# EAGLE board Relay_block_v1_pcb_layout (EAGLE 9.7.0)
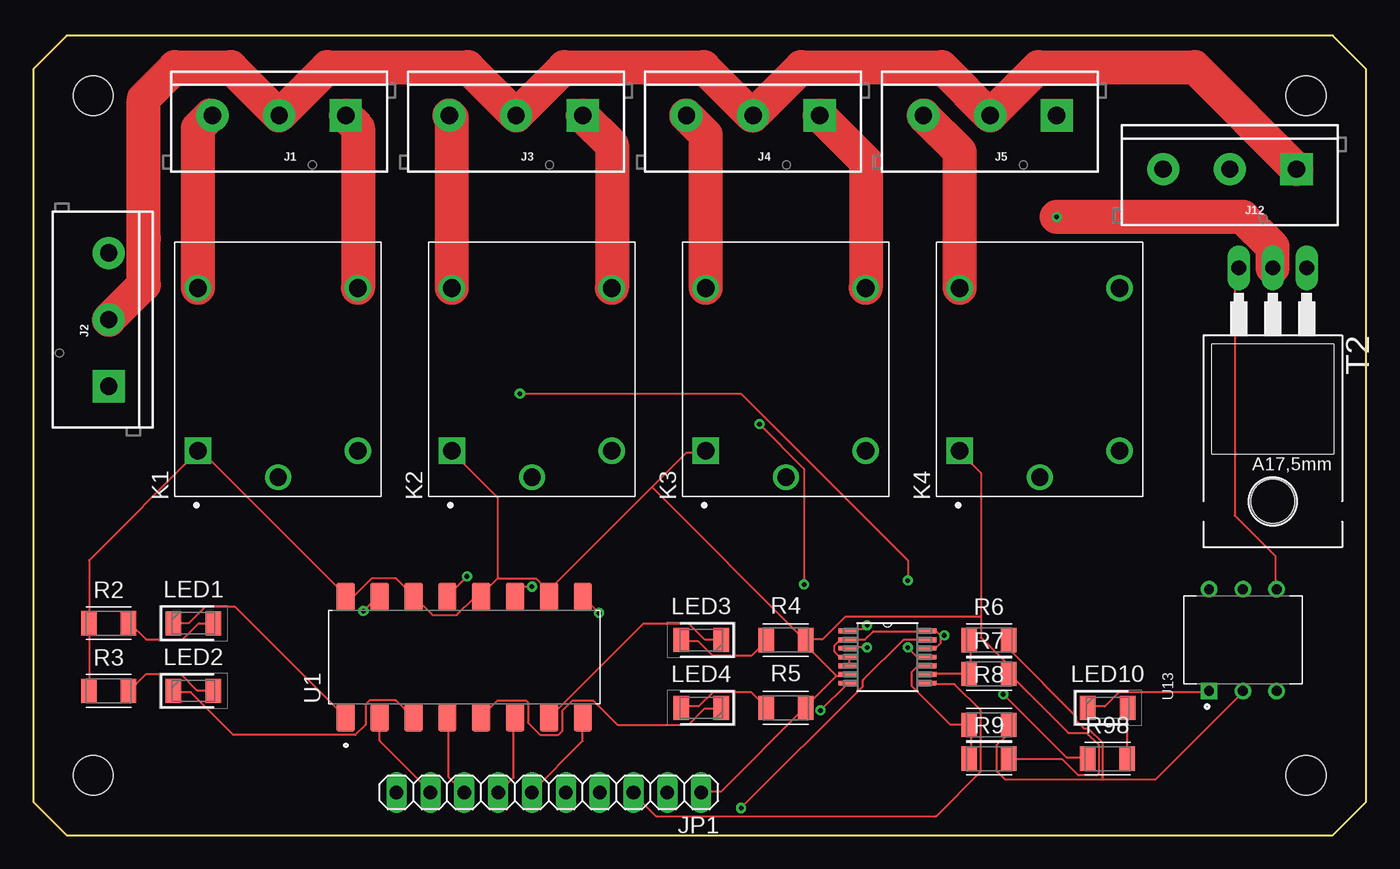
[diagram p0: board, top side]
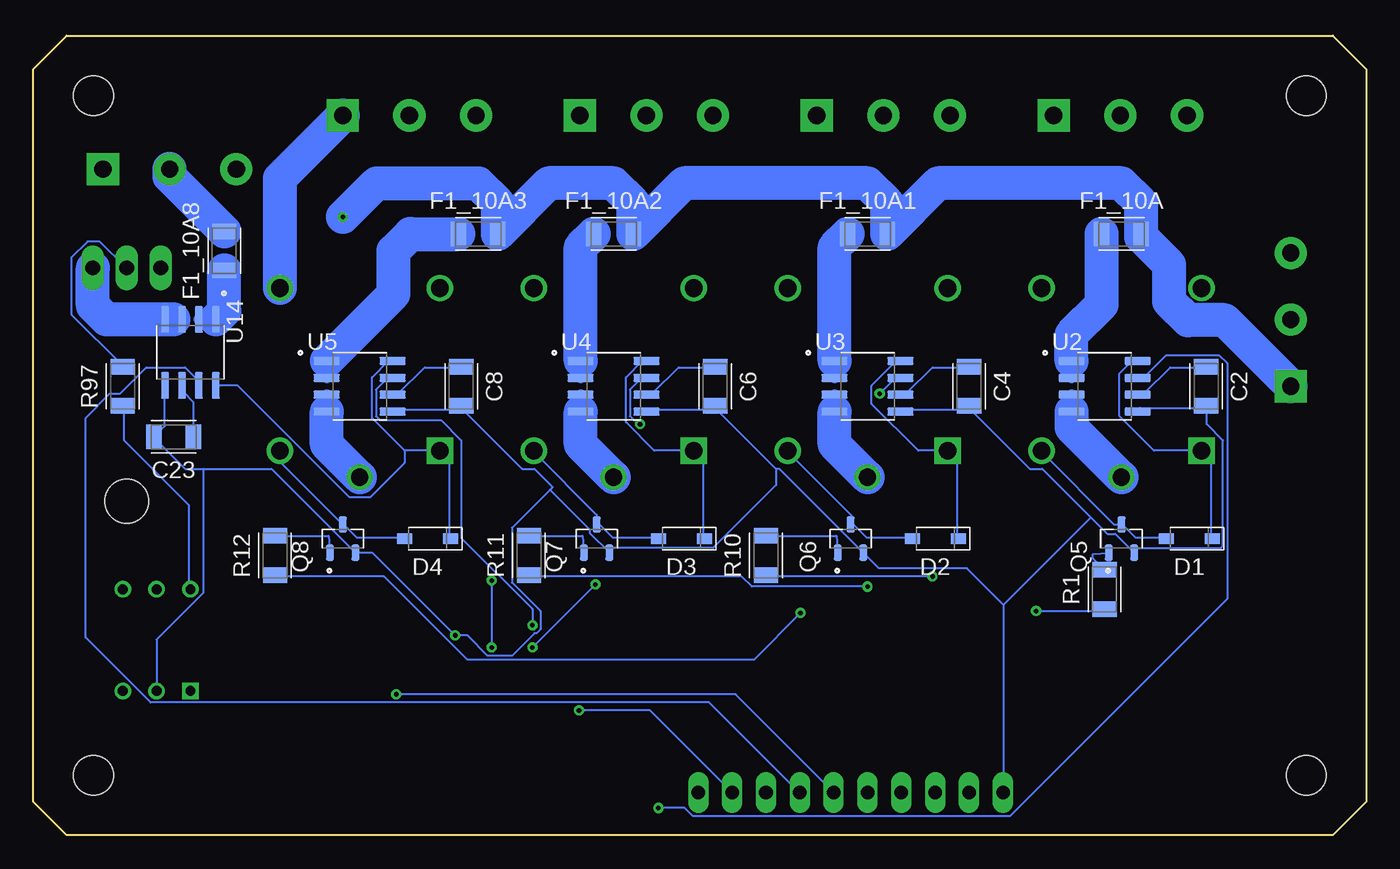
[diagram p1: board, bottom side, seen from below]

Size 100 x 60 mm. Coordinates in mm from the lower left corner, seen from the top.
Outline: 0,57.5 0,2.5 2.5,0 97.5,0 100,2.5 100,57.5 97.5,60 2.5,60 0,57.5
Copper layers (1*16): Top 0.035mm / dielectric 1.5mm / Bottom 0.035mm
Design rules "default": minimum track width 6mil, minimum drill 0.35mm, track to track 6mil, track to pad 6mil, pad to pad 6mil, via to via 6mil, smd to smd 6mil, copper to edge 40mil, drill to drill 6mil, minimum pad ring 10mil, minimum via ring 8mil, stop-mask expansion 4mil, vias tented up to drill 0mil, thermal gap 10mil
Holes 3 mm at 95.5,4.5 4.5,4.5 4.5,55.5 95.5,55.5

## Footprints (pad centres in the part's own frame; a part is rotated, then mirrored left to right if it is on the bottom)
CAPC3216X135 = smd 1.165 x 1.815: 1 -1.475,0; 2 1.475,0
SOD3715X135 = smd 1.127 x 0.784: 1 -1.722,0; 2 1.722,0
FUSC3215X82N = smd 1.165 x 1.814: 1 -1.475,0; 2 1.475,0
SCREWTERMINAL-5MM-3 = drill 1.3 pad 2.413 square: 1 0,0 | drill 1.3 pad 2.413: 2 5,0; 3 10,0
1X10 = drill 1.016 long: 1 -11.43,0; 2 -8.89,0; 3 -6.35,0; 4 -3.81,0; 5 -1.27,0; 6 1.27,0; 7 3.81,0; 8 6.35,0; 9 8.89,0; 10 11.43,0
RELAY_SRD-05VDC-SL-C = drill 1.32 square: A1 -6.1,6 | drill 1.32: A2 -6.1,-6; NC 6.1,6; NO 6.1,-6 | drill 1.29: COM -8.1,0
LEDC3216X95N = smd 1.15 x 1.8: 1 -1.5,0; 2 1.5,0
SOT95P237X111-3N = smd 1.23 x 0.6: 1 -1.06,0.95; 2 -1.06,-0.95; 3 1.06,0
RESC3216X70 = smd 1.165 x 1.815: 1 -1.475,0; 2 1.475,0
TO220AB = drill 1.118 long: 1 -2.54,-6.35; 2 0,-6.35; 3 2.54,-6.35 | hole 3.302: 0,11.176
SOIC254P1016X460-16N = smd 2.09 x 1.39: 1 -4.54,8.89; 2 -4.54,6.35; 3 -4.54,3.81; 4 -4.54,1.27; 5 -4.54,-1.27; 6 -4.54,-3.81; 7 -4.54,-6.35; 8 -4.54,-8.89; 9 4.54,-8.89; 10 4.54,-6.35; 11 4.54,-3.81; 12 4.54,-1.27; 13 4.54,1.27; 14 4.54,3.81; 15 4.54,6.35; 16 4.54,8.89
SOIC127P600X175-8N = smd 1.97 x 0.6: 1 -2.475,1.905; 2 -2.475,0.635; 3 -2.475,-0.635; 4 -2.475,-1.905; 5 2.475,-1.905; 6 2.475,-0.635; 7 2.475,0.635; 8 2.475,1.905
DIP762W45P254L889H508Q6 = drill 0.73 pad 1.13 square: 1 -3.81,2.54 | drill 0.73 pad 1.13: 2 -3.81,0; 3 -3.81,-2.54; 4 3.81,-2.54; 5 3.81,0; 6 3.81,2.54
SOP65P640X120-14N = smd 1.473 x 0.356: 1 -2.921,1.956; 2 -2.921,1.295; 3 -2.921,0.66; 4 -2.921,0; 5 -2.921,-0.66; 6 -2.921,-1.295; 7 -2.921,-1.956; 8 2.921,-1.956; 9 2.921,-1.295; 10 2.921,-0.66; 11 2.921,0; 12 2.921,0.66; 13 2.921,1.295; 14 2.921,1.956

## Placement (x,y rotation side)
C2  1nF  [CAPC3216X135]  12.01,33.69 270 bottom
C4  1nF  [CAPC3216X135]  29.79,33.69 270 bottom
C6  1nF  [CAPC3216X135]  48.84,33.69 270 bottom
C8  1nF  [CAPC3216X135]  67.89,33.69 270 bottom
C23  1nF  [CAPC3216X135]  89.47,29.9 180 bottom
D1  1N4148W  [SOD3715X135]  13.28,22.26 180 bottom
D2  1N4148W  [SOD3715X135]  32.33,22.26 180 bottom
D3  1N4148W  [SOD3715X135]  51.38,22.26 180 bottom
D4  1N4148W  [SOD3715X135]  70.43,22.26 180 bottom
F1_10A  FUSE  [FUSC3215X82N]  18.36,45.12 0 bottom
F1_10A1  FUSE  [FUSC3215X82N]  37.41,45.12 0 bottom
F1_10A2  FUSE  [FUSC3215X82N]  56.46,45.12 0 bottom
F1_10A3  FUSE  [FUSC3215X82N]  66.62,45.12 0 bottom
F1_10A8  FUSE  [FUSC3215X82N]  85.67,43.85 90 bottom
J1  [SCREWTERMINAL-5MM-3]  23.44,54.01 180 top
J2  [SCREWTERMINAL-5MM-3]  5.66,33.69 90 top
J3  [SCREWTERMINAL-5MM-3]  41.22,54.01 180 top
J4  [SCREWTERMINAL-5MM-3]  59,54.01 180 top
J5  [SCREWTERMINAL-5MM-3]  76.78,54.01 180 top
J12  [SCREWTERMINAL-5MM-3]  94.77,49.99 180 top
JP1  PINHD-1X10  [1X10]  38.68,3.21 180 top
K1  SRD-05VDC-SL-C  [RELAY_SRD-05VDC-SL-C]  18.36,34.96 90 top
K2  SRD-05VDC-SL-C  [RELAY_SRD-05VDC-SL-C]  37.41,34.96 90 top
K3  SRD-05VDC-SL-C  [RELAY_SRD-05VDC-SL-C]  56.46,34.96 90 top
K4  SRD-05VDC-SL-C  [RELAY_SRD-05VDC-SL-C]  75.51,34.96 90 top
LED1  APT3216LZGCK  [LEDC3216X95N]  12.01,15.91 0 top
LED2  APT3216LZGCK  [LEDC3216X95N]  12.01,10.83 0 top
LED3  APT3216LZGCK  [LEDC3216X95N]  50.11,9.56 180 top
LED4  APT3216LZGCK  [LEDC3216X95N]  50.11,14.64 180 top
LED10  APT3216LZGCK  [LEDC3216X95N]  80.59,9.56 0 top
Q5  MMBT2222ALT1  [SOT95P237X111-3N]  18.36,22.26 90 bottom
Q6  MMBT2222ALT1  [SOT95P237X111-3N]  38.68,22.26 90 bottom
Q7  MMBT2222ALT1  [SOT95P237X111-3N]  57.73,22.26 90 bottom
Q8  MMBT2222ALT1  [SOT95P237X111-3N]  76.78,22.26 90 bottom
R1  1k  [RESC3216X70]  19.63,18.45 90 bottom
R2  1k  [RESC3216X70]  5.66,15.91 0 top
R3  1k  [RESC3216X70]  5.66,10.83 0 top
R4  1k  [RESC3216X70]  56.46,9.56 180 top
R5  1k  [RESC3216X70]  56.46,14.64 180 top
R6  [RESC3216X70]  71.7,14.64 0 top
R7  [RESC3216X70]  71.7,12.1 0 top
R8  [RESC3216X70]  71.7,8.29 0 top
R9  [RESC3216X70]  71.7,5.75 0 top
R10  1k  [RESC3216X70]  45.03,20.99 90 bottom
R11  1k  [RESC3216X70]  62.81,20.99 90 bottom
R12  1k  [RESC3216X70]  81.86,20.99 90 bottom
R97  470  [RESC3216X70]  93.29,33.69 90 bottom
R98  220  [RESC3216X70]  80.59,5.75 0 top
T2  BT136-TO220  [TO220AB]  92.99,36.23 180 top
U1  LTV-847S  [SOIC254P1016X460-16N]  32.33,13.37 90 top
U2  ACS712ELCTR-05B-T  [SOIC127P600X175-8N]  19.63,33.69 0 bottom
U3  ACS712ELCTR-05B-T  [SOIC127P600X175-8N]  37.41,33.69 0 bottom
U4  ACS712ELCTR-05B-T  [SOIC127P600X175-8N]  56.46,33.69 0 bottom
U5  ACS712ELCTR-05B-T  [SOIC127P600X175-8N]  75.51,33.69 0 bottom
U13  MOC3021  [DIP762W45P254L889H508Q6]  90.75,14.64 90 top
U14  ACS712ELCTR-05B-T  [SOIC127P600X175-8N]  88.21,36.23 270 bottom
U$1  MCP3424-E/ST  [SOP65P640X120-14N]  64.08,13.37 0 top

## Library data of the parts
C2 C4 C6 C8 C23 = Capacitor; CATEGORY: Capacitor
D1-D4 = Diode; CATEGORY: Diode; DESCRIPTION: DIODE GEN PURP 100V 300MA SOD123; MANUFACTURER: Diodes Incorporated; SUB-CATEGORY: Rectifier
F1_10A F1_10A1-F1_10A3 F1_10A8 = Circuit-Protection; CATEGORY: Circuit-Protection; SUB-CATEGORY: Fuse
J1-J5 J12 = SparkFun-Connectors; PROD_ID: CONN-10134; SF_SKU: PRT-08433
JP1 = Connector; CATEGORY: CONNECTOR; SUB-CATEGORY: PIN-HEADER
K1-K4 = SRD-05VDC-SL-C; MANUFACTURER: SONGLE RELAY; STANDARD: IPC-7251
LED1-LED4 LED10 = APT3216LZGCK; ALLIED_NUMBER: 71056210; ALLIED_PRICE-STOCK: https://www.alliedelec.com/kingbright-apt3216lzgck/71056210/; DESCRIPTION: 3.2X1.6mm Low Current Green SMD LED; Water Clear; 525nm; 120 Viewing Angle; HEIGHT: 0.95mm; MANUFACTURER_NAME: Kingbright; MANUFACTURER_PART_NUMBER: APT3216LZGCK; MOUSER_PART_NUMBER: 604-APT3216LZGCK; MOUSER_PRICE-STOCK: https://www.mouser.com/Search/Refine.aspx?Keyword=604-APT3216LZGCK
Q5-Q8 = MMBT2222ALT1; AVAILABILITY: Warning; DESCRIPTION: Bipolar (BJT) Transistor NPN 40V 600mA 300MHz 225mW Surface Mount SOT-23-3 (TO-236); MF: ON Semiconductor; MP: MMBT2222ALT1; PACKAGE: SOT-23-3 ON Semiconductor; PRICE: None; PURCHASE-URL: https://pricing.snapeda.com/search/part/MMBT2222ALT1/?ref=eda
R1-R12 R97 R98 = Resistor; CATEGORY: Resistor; SUB-CATEGORY: Fixed
T2 = BT136; AVAILABILITY: Warning; DESCRIPTION: TRIAC Standard 600V 4A Surface Mount DPAK; MF: Rectron; MP: BT136; PACKAGE: TO-252-3 Rectron; PRICE: None; PURCHASE-URL: https://pricing.snapeda.com/search/part/BT136/?ref=eda
U1 = LTV-847S; MANUFACTURER: LITE-ON Technology; MAXIMUM_PACKAGE_HEIGHT: 4.6 mm; PARTREV: January 2010; STANDARD: IPC 7351B
U2-U5 U14 = ACS712ELCTR-05B-T
U13 = MOC3021; AVAILABILITY: Good; DESCRIPTION: Optoisolator Triac Output 5000Vrms 1 Channel 6-SMD; MF: Lite-On; MP: MOC3021; PACKAGE: DIP-6 Lite-On; PRICE: None; PURCHASE-URL: https://pricing.snapeda.com/search/part/MOC3021/?ref=eda
U$1 = MCP3424-E_ST

## Nets
5V0: D1.1 D2.1 D3.1 D4.1 JP1.1 K1.A1 K2.A1 K3.A1 K4.A1 R2.1 R3.1 R4.1 R5.1 R7.2 R9.2 U1.10 U1.12 U1.14 U1.16 U2.8 U3.8 U4.8 U5.8 U14.8 U$1.6
GND: C2.2 C4.2 C6.2 C8.2 C23.2 JP1.10 Q5.2 Q6.2 Q7.2 Q8.2 R6.2 R8.2 U2.5 U3.5 U4.5 U5.5 U13.2 U14.5 U$1.2 U$1.4 U$1.5 U$1.12 U$1.14
N$1: LED2.2 R3.2
N$2: R1.1 U1.15
N$3: Q5.1 R1.2
N$4: K1.COM U2.3 U2.4
N$5: LED1.2 R2.2
N$6: LED1.1 U1.1
N$7: LED2.1 U1.3
N$8: LED3.2 R4.2
N$9: LED3.1 U1.5
N$10: LED4.2 R5.2
N$11: LED4.1 U1.7
N$12: D1.2 K1.A2 Q5.3
N$13: C2.1 U2.6
N$14: F1_10A.1 U2.1 U2.2
N$15: JP1.6 U1.8
N$16: J1.3 K1.NC
N$17: J1.1 K1.NO
N$18: JP1.7 U1.6
N$19: JP1.2 U$1.7
N$20: J1.2 J2.2 J3.2 J4.2 J5.2 J12.1
N$21: R8.1 R9.1 U$1.10
N$22: R6.1 R7.1 U$1.9
N$23: Q6.1 R10.2
N$24: D2.2 K2.A2 Q6.3
N$25: R10.1 U1.13
N$26: K2.COM U3.3 U3.4
N$27: C4.1 U3.6
N$28: F1_10A1.1 U3.1 U3.2
N$29: J3.3 K2.NC
N$30: J3.1 K2.NO
N$31: JP1.5 R98.1
N$32: JP1.8 U1.4
N$33: Q7.1 R11.2
N$34: D3.2 K3.A2 Q7.3
N$35: R11.1 U1.11
N$36: K3.COM U4.3 U4.4
N$37: C6.1 U4.6
N$38: F1_10A2.1 U4.1 U4.2
N$39: J4.3 K3.NC
N$40: J4.1 K3.NO
N$41: JP1.9 U1.2
N$42: JP1.4 U14.7
N$43: Q8.1 R12.2
N$44: D4.2 K4.A2 Q8.3
N$45: R12.1 U1.9
N$46: K4.COM U5.3 U5.4
N$47: C8.1 U5.6
N$48: F1_10A3.1 U5.1 U5.2
N$49: J5.3 K4.NC
N$50: J5.1 K4.NO
N$54: U2.7 U$1.13
N$55: U3.7 U$1.11
N$56: U4.7 U$1.3
N$57: U5.7 U$1.1
N$84: F1_10A1.2 F1_10A2.2 F1_10A3.2 F1_10A.2 J2.1 R97.2 T2.2
N$154: F1_10A8.2 J12.2
N$156: T2.1 U14.3 U14.4
N$189: T2.3 U13.4
N$190: LED10.2 R98.2
N$191: LED10.1 U13.1
N$192: R97.1 U13.6
N$193: JP1.3 U$1.8
N$195: C23.1 U14.6
N$203: F1_10A8.1 U14.1 U14.2

## Tracks (layer width: path | path; a pad name or v marks a point on that pad's centre or on a via)
5V0
  Top 0.152: 60.27,11.95 61.03,11.95 U$1.6 | 60.27,11.95 57.99,9.66 R4.1 57.83,9.51 51.58,3.26 50.21,3.26 JP1.1 | 60.27,11.95 57.99,14.24 57.99,14.54 R5.1 | R9.2 73.23,5.7 77.19,5.7 78.41,4.48 79.78,4.48 79.93,4.63 79.93,6.77 79.02,7.68 77.65,7.68 73.23,12.1 R7.2 73.07,12.1 73.07,12.86 71.09,14.84 71.09,16.37 | 71.09,16.37 71.09,27.19 69.57,28.71 K4.A1 | 71.09,16.37 60.88,16.37 59.2,14.69 57.99,14.69 R5.1 | R2.1 4.19,10.88 R3.1 | R2.1 4.19,20.64 12.27,28.71 K1.A1 12.42,28.71 12.72,28.71 23.39,18.05 U1.16 23.54,18.05 24.15,18.05 25.37,19.26 27.2,19.26 28.42,18.05 U1.14 28.57,17.89 29.94,16.52 31.77,16.52 33.14,17.89 33.6,17.89 U1.12 33.6,18.05 34.82,19.26 | R2.1 | 38.63,18.35 38.63,18.05 U1.10 38.63,18.35 | 38.63,18.35 37.72,19.26 34.82,19.26 | 34.82,19.26 34.82,25.36 31.47,28.71 K2.A1 | 38.63,18.35 46.4,26.12 | 46.4,26.12 48.99,28.71 50.37,28.71 K3.A1 | 46.4,26.12 57.83,14.69 R5.1
  Bottom 0.152: D4.1 68.81,22.31 68.81,28.1 69.42,28.71 K4.A1 69.57,28.87 72.16,28.87 | 72.16,28.87 74.6,31.3 74.6,34.35 73.38,35.57 73.07,35.57 U5.8 | 72.16,28.87 72.16,27.95 74.75,25.36 76.27,25.36 84.66,33.74 86.18,33.74 U14.8 | D1.1 11.66,22.31 11.66,28.1 12.27,28.71 K1.A1 12.42,28.87 15.92,28.87 18.51,31.46 18.51,34.66 17.6,35.57 17.29,35.57 U2.8 | D3.1 49.76,22.31 49.76,28.1 50.37,28.71 K3.A1 50.52,28.87 53.41,28.87 55.55,31 55.55,34.35 54.33,35.57 54.02,35.57 U4.8 | D2.1 30.71,22.31 30.71,28.1 31.32,28.71 K2.A1 31.47,28.87 33.6,28.87 37.11,32.37 37.11,33.74 35.28,35.57 34.97,35.57 U3.8
GND  (via drill 0.35)
  Top 0.152: 80.24,4.18 84.2,4.18 90.75,10.73 U13.2 | 80.24,4.18 72.92,4.18 72.31,4.79 72.31,6.77 73.07,7.53 73.07,8.29 R8.2 | 80.24,4.18 80.24,6.92 79.17,7.99 78.86,7.99 78.25,8.6 78.25,8.9 73.23,13.93 73.23,14.54 R6.2 | 68.04,15 68.04,14.39 67.74,14.08 67.13,14.08 U$1.12 | 68.04,15 67.74,15.3 67.13,15.3 U$1.14 66.98,15.3 63.01,15.3 62.41,14.69 61.19,14.69 U$1.2 61.03,14.54 60.42,14.54 60.12,14.24 60.12,13.78 60.42,13.47 61.03,13.47 U$1.4 61.19,13.32 61.19,12.71 U$1.5 | v68.35,15 68.04,15
  Bottom 0.152: 87.25,27.49 88.62,27.49 90.9,29.78 C23.2 90.9,29.93 90.14,30.69 90.14,33.74 U14.5 | U13.2 90.75,14.69 87.25,18.2 87.25,27.49 | 67.74,31.91 67.89,32.07 C8.2 67.74,31.91 | 67.74,31.91 63.32,27.49 62.41,27.49 61.03,26.12 61.23,25.92 | 67.74,31.91 72.92,31.91 U5.5 | 48.69,31.91 48.84,32.07 C6.2 48.69,31.91 | 48.69,31.91 44.27,27.49 | 48.69,31.91 53.87,31.91 U4.5 | U2.5 17.14,31.91 16.99,32.07 12.11,32.07 C2.2 11.96,32.07 11.96,30.85 10.74,29.63 10.74,21.7 10.89,21.55 17.75,21.55 17.75,21.54 Q5.2 18.83,22.62 19.43,22.62 20.65,23.84 | 20.65,23.84 24.31,27.49 25.22,27.49 29.64,31.91 | 29.64,31.91 29.79,32.07 C4.2 29.64,31.91 | 29.64,31.91 34.82,31.91 U3.5 | 27.2,17.28 27.2,3.26 JP1.10 | 20.65,23.84 27.2,17.28 | 27.2,17.28 29.94,20.03 36.56,20.03 Q6.2 44.02,27.49 44.27,27.49 | 44.27,27.49 44.27,26.27 48.99,21.55 56.45,21.55 56.78,21.22 | 61.23,25.92 64.08,23.07 64.08,18.96 61.95,16.83 61.95,15.45 62.25,15.15 62.41,15.15 64.08,13.47 65.91,13.47 67.43,15 v68.35,15 74.55,21.2 Q8.2 82.12,27.49 87.25,27.49 | 61.23,25.92 58.26,22.95 58.26,22.7 56.78,21.22 | 56.78,21.22 Q7.2
N$1
  Top 0.152: LED2.2 13.48,10.88 12.27,10.88 11.05,12.1 8.46,12.1 7.24,10.88 R3.2
N$2  (via drill 0.35)
  Top 0.152: v24.76,16.83 25.98,18.05 U1.15
  Bottom 0.152: v24.76,16.83 19.73,16.83 R1.1
N$3
  Bottom 0.152: Q5.1 20.5,21.11 20.5,20.79 19.73,20.03 R1.2
N$4
  Bottom 0.813: U2.3 U2.4
  Bottom 2.54: K1.COM 22.11,30.61 U2.4
N$5
  Top 0.152: LED1.2 12.42,15.91 11.2,14.69 8.46,14.69 7.24,15.91 R2.2
N$6
  Top 0.152: LED1.1 11.66,15.91 12.88,17.13 15.16,17.13 23.39,8.9 U1.1
N$7
  Top 0.152: LED2.1 10.59,10.73 11.81,10.73 15.01,7.53 24.15,7.53 24.91,8.29 24.91,9.82 25.22,10.12 27.2,10.12 28.42,8.9 U1.3
N$8
  Top 0.152: LED3.2 48.69,9.66 49.91,9.66 50.98,10.73 53.87,10.73 54.94,9.66 R4.2
N$9
  Top 0.152: LED3.1 51.58,9.51 50.37,9.51 49.15,8.29 43.81,8.29 41.98,10.12 40.46,10.12 39.7,9.36 39.7,7.83 39.39,7.53 38.02,7.53 37.11,8.44 37.11,9.97 36.95,10.12 34.82,10.12 33.6,8.9 U1.5
N$10
  Top 0.152: LED4.2 48.69,14.54 49.91,14.54 50.98,13.47 53.87,13.47 54.94,14.54 R5.2
N$11
  Top 0.152: LED4.1 51.58,14.69 50.37,14.69 49.15,15.91 45.79,15.91 38.78,8.9 U1.7
N$12
  Bottom 0.152: D1.2 15.01,22.31 17.29,22.31 18.31,23.33 Q5.3 18.91,23.32 24.31,28.71 K1.A2
N$13
  Bottom 0.152: C2.1 12.11,35.11 14.7,35.11 16.69,33.13 17.14,33.13 U2.6
N$14
  Bottom 0.813: U2.2 U2.1
  Bottom 2.54: U2.1 22.11,37.57 19.84,39.84 F1_10A.1
N$15
  Top 0.152: U1.8 41.22,7.07 37.41,3.26 JP1.6
N$16
  Top 0.152: 13.48,54.01 J1.3 13.28,54.01
  Top 2.54: K1.NC 12.36,53.09 13.28,54.01
N$17
  Top 2.54: J1.1 24.36,53.09 K1.NO
N$18
  Top 0.152: U1.6 36.04,8.75 36.04,4.33 34.97,3.26 JP1.7
N$19  (via drill 0.35)
  Top 0.152: v59.05,9.36 61.03,11.34 U$1.7
  Bottom 0.152: v59.05,9.36 53.72,9.36 JP1.2
N$20
  Top 2.54: J2.2 8.29,41.32 8.29,44.78 8.29,44.79 8.29,55.28 10.64,57.64 14.81,57.64 J1.2 22.07,57.64 32.59,57.64 J3.2 39.85,57.64 50.29,57.64 53.92,54.01 J4.2 57.63,57.64 68.15,57.64 J5.2 75.41,57.64 87.12,57.64 J12.1
N$21
  Top 0.152: U$1.10 66.37,12.71 65.91,12.25 65.91,11.19 68.81,8.29 R8.1 70.33,8.29 70.33,5.85 R9.1
N$22
  Top 0.152: U$1.9 67.13,12.1 R7.1 70.33,12.1 70.33,14.54 R6.1
N$23
  Bottom 0.152: R10.2 39.76,22.47 Q6.1
N$24
  Bottom 0.152: 38.63,23.48 37.46,22.31 34.06,22.31 D2.2 | 38.63,23.48 Q6.3 | K2.A2 43.36,28.71 38.63,23.99 38.63,23.48
N$25  (via drill 0.35)
  Top 0.152: v32.53,19.42 31.16,18.05 U1.13
  Bottom 0.152: v32.53,19.42 45.03,19.42 R10.1
N$26
  Bottom 0.813: U3.3 U3.4
  Bottom 2.54: K2.COM 39.89,29.34 U3.4
N$27
  Bottom 0.152: C4.1 29.79,35.11 32.53,35.11 34.52,33.13 34.82,33.13 U3.6
N$28
  Bottom 0.813: U3.2 U3.1
  Bottom 2.54: U3.1 39.89,44.12 F1_10A1.1
N$29
  Top 2.54: K2.NC 31.41,53.82 J3.3
N$30
  Top 2.54: J3.1 43.41,51.82 K2.NO
N$31  (via drill 0.35)
  Top 0.152: v72.77,10.58 77.49,5.85 79.02,5.85 R98.1
  Bottom 0.152: v72.77,10.58 47.32,10.58 JP1.5
N$32
  Top 0.152: U1.4 31.16,8.75 31.16,4.33 32.23,3.26 JP1.8
N$33
  Bottom 0.152: R11.2 58.81,22.47 Q7.1
N$34
  Bottom 0.152: D3.2 53.11,22.31 56.51,22.31 57.68,23.48 Q7.3 57.73,24.04 62.41,28.71 K3.A2
N$35  (via drill 0.35)
  Top 0.152: v37.41,18.65 36.8,18.65 36.19,18.05 U1.11
  Bottom 0.152: v37.41,18.65 46.1,18.65 46.86,19.42 62.71,19.42 R11.1
N$36
  Bottom 0.813: U4.3 U4.4
  Bottom 2.54: K3.COM 58.94,29.34 U4.4
N$37
  Bottom 0.152: C6.1 48.84,35.11 51.58,35.11 53.57,33.13 53.87,33.13 U4.6
N$38
  Bottom 0.813: U4.2 U4.1
  Bottom 2.54: U4.1 58.94,44.12 F1_10A2.1
N$39
  Top 2.54: K3.NC 50.46,52.55 J4.3
N$40
  Top 2.54: J4.1 62.46,50.55 K3.NO
N$41
  Top 0.152: U1.2 25.98,7.07 29.79,3.26 JP1.9
N$42
  Bottom 0.152: U14.7 87.7,33.89 87.7,34.2 88.62,35.11 91.51,35.11 93.49,33.13 94.26,33.13 96.09,31.3 96.09,14.84 91.21,9.97 49.3,9.97 42.59,3.26 JP1.4
N$43
  Bottom 0.152: R12.2 77.86,22.47 Q8.1
N$44
  Bottom 0.152: 76.68,23.28 75.71,22.31 72.16,22.31 D4.2 | 76.68,23.28 76.88,23.48 | 81.46,28.71 81.47,28.76 | 81.47,28.76 K4.A2 | 81.47,28.76 81.47,28.01 Q8.3 76.73,23.23 76.68,23.28
N$45  (via drill 0.35)
  Top 0.152: v42.44,16.67 41.22,17.89 U1.9
  Bottom 0.152: v42.44,16.67 45.95,13.17 67.43,13.17 73.68,19.42 81.76,19.42 R12.1
N$46
  Bottom 0.813: U5.3 U5.4
  Bottom 2.54: K4.COM 77.99,29.34 U5.4
N$47
  Bottom 0.152: C8.1 67.89,35.11 70.63,35.11 72.62,33.13 72.92,33.13 U5.6
N$48
  Bottom 0.813: U5.2 U5.1
  Bottom 2.54: U5.1 72.97,40.61 72.97,43.85 71.7,45.12 F1_10A3.1
N$49
  Top 2.54: K4.NC 69.51,51.28 J5.3
N$50  (via drill 0.35)
  Bottom 2.54: J5.1 81.51,49.28 K4.NO
  other vias: 76.78,54.01
N$54  (via drill 0.35)
  Top 0.152: v53.11,2.04 62.25,11.19 62.25,11.64 65.3,14.69 66.98,14.69 U$1.13
  Bottom 0.152: v53.11,2.04 51.13,2.04 50.52,1.43 26.74,1.43 10.44,17.74 10.44,35.42 11.05,36.03 15.01,36.03 16.69,34.35 17.14,34.35 U2.7
N$55  (via drill 0.35)
  Top 0.152: v65.61,14.08 66.22,13.47 66.98,13.47 U$1.11 | v65.61,19.11 65.61,20.64 53.11,33.13 v36.5,33.13
  Bottom 0.152: v65.61,19.11 v65.61,14.08 | v36.5,33.13 35.43,34.2 34.97,34.2 U3.7
N$56  (via drill 0.35)
  Top 0.152: v62.56,14.08 61.19,14.08 U$1.3 | v57.83,18.81 57.83,27.49 v54.48,30.85
  Bottom 0.152: v57.83,18.81 v62.56,14.08 | v54.48,30.85 54.79,31.15 54.94,31.15 55.24,31.46 55.24,33.44 54.48,34.2 54.02,34.2 U4.7
N$57  (via drill 0.35)
  Top 0.152: v62.56,15.76 62.25,15.45 61.19,15.45 U$1.1
  Bottom 0.152: v62.56,15.76 62.56,16.98 67.89,22.31 67.89,29.63 69.42,31.15 73.99,31.15 74.29,31.46 74.29,33.44 73.53,34.2 73.07,34.2 U5.7
N$84  (via drill 0.35)
  Top 2.54: T2.2 92.99,44.15 90.75,46.39 v76.78,46.39
  Bottom 0.152: R97.2 93.34,35.27 97.15,39.08 97.15,43.34 95.93,44.56 95.02,44.56 93.04,42.58 T2.2
  Bottom 2.54: J2.1 10.62,38.65 13.36,38.65 14.77,40.06 14.77,42.8 16.89,44.92 F1_10A.2 16.89,47.46 18.36,48.93 32.13,48.93 F1_10A1.2 35.94,47.46 37.41,48.93 51.18,48.93 F1_10A2.2 54.99,47.46 56.46,48.93 61.34,48.93 F1_10A3.2 65.15,47.46 66.62,48.93 74.24,48.93 v76.78,46.39
N$154
  Bottom 2.54: F1_10A8.2 89.77,49.43 J12.2
N$156
  Bottom 0.813: U14.3 89.48,38.71 U14.4
  Bottom 2.54: 89.48,38.71 94.5,38.71 95.53,39.74 T2.1
N$189
  Top 0.152: U13.4 93.19,18.5 93.19,20.94 90.14,23.99 90.14,42.28 T2.3
N$190
  Top 0.152: LED10.2 82.06,9.51 82.06,5.85 R98.2
N$191
  Top 0.152: LED10.1 79.17,9.66 80.39,9.66 81.46,10.73 88.16,10.73 U13.1
N$192
  Bottom 0.152: R97.1 93.19,32.07 93.19,29.63 88.31,24.75 88.31,18.5 U13.6
N$193
  Top 0.152: U$1.8 67.13,11.34 69.11,11.34 71.09,9.36 71.09,4.79 67.74,1.43 46.71,1.43 45.03,3.11 JP1.3
N$195
  Bottom 0.152: C23.1 88.01,29.93 88.01,32.52 88.77,33.29 88.77,33.74 U14.6
N$203
  Bottom 0.813: U14.2 U14.1
  Bottom 2.54: U14.1 85.67,39.34 F1_10A8.1